# Altium PCB ESP_PCB.PcbDoc
Units mil, origin at the board's own origin, x right, y up, seen from the top; angles counter-clockwise.
Board outline 3180 x 3225 mil, 2 copper layers (Top Layer, Bottom Layer); 49 components, 37 nets, 138 pads, 0 vias.
Unrouted connection lines stored in the file: 80.
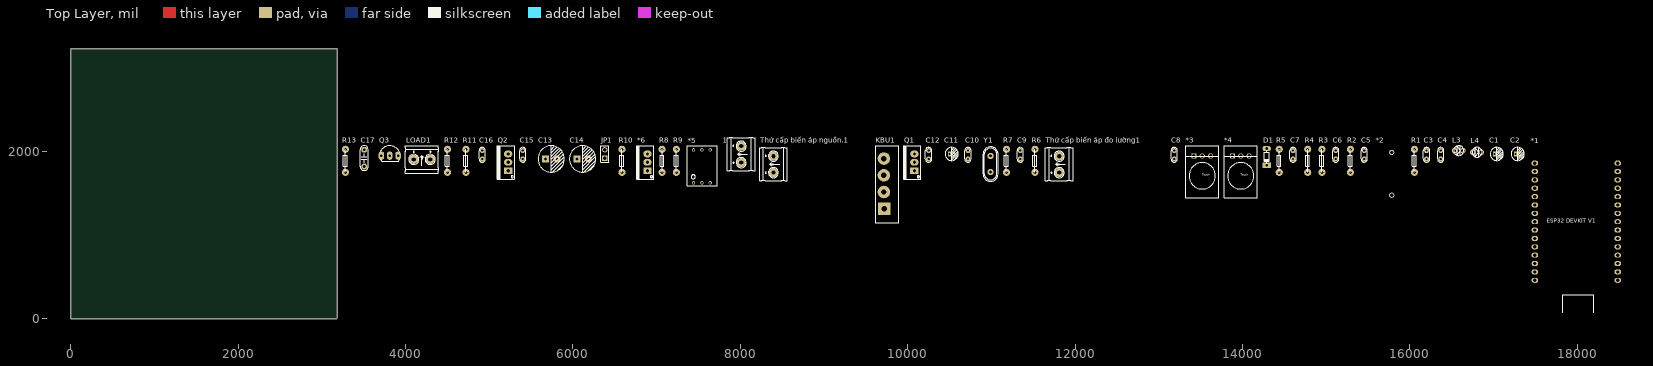
[diagram p0: Top Layer view]
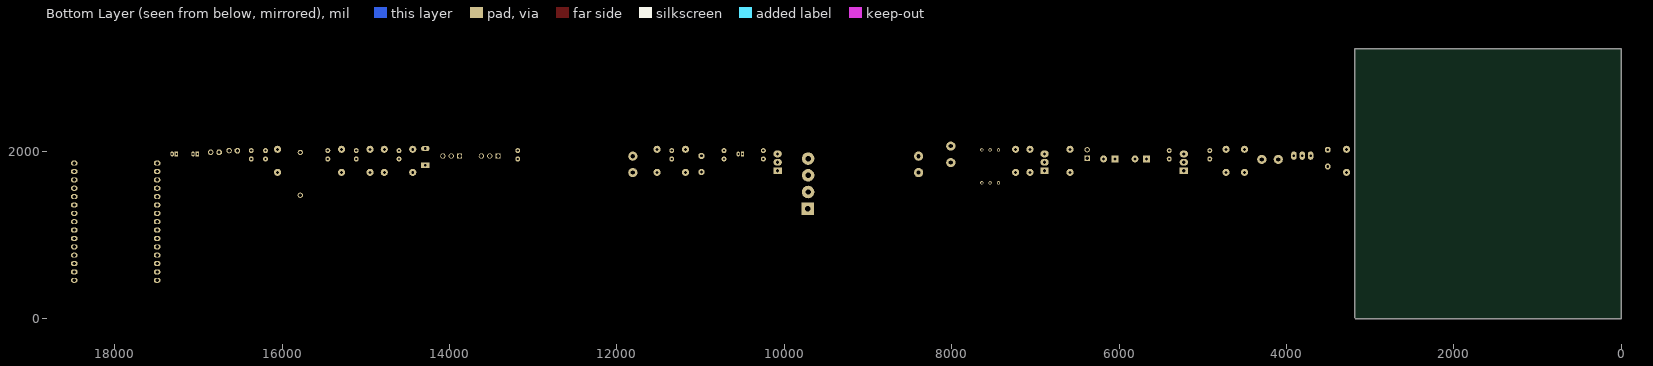
[diagram p1: Bottom Layer view, seen from below]

## Layer stack, top to bottom
Top Solder: solder mask 0.4, Solder Resist, Dk 3.5
Top Layer: signal copper 1.4
Dielectric 1: dielectric 12.6, FR-4, Dk 4.8
Bottom Layer: signal copper 1.4
Bottom Solder: solder mask 0.4, Solder Resist, Dk 3.5

## Board outline
0,0 0,3225 3180,3225 3180,10 3170,0

## Design rules (kind name [scope] priority, off if disabled: settings)
Clearance [All] p1: gap=10 ignorepadtopadclearanceinfootprint=FALSE except(0: Arc-Hole Track-Hole SMDPad-Hole THPad-Hole Via-Hole Fill-Hole Poly-Hole Region-Hole Text-Hole)
PlaneClearance [All] p1: clearance=40
PlaneConnect [All] p1: planeconnectstyle=Relief reliefexpansion=20 reliefentries=4 reliefconductorwidth=20 reliefairgap=20
PolygonConnect [All] p1: connectstyle=Relief reliefconductorwidth=20 reliefentries=4 polygonreliefangle="90 Angle" airgapwidth=20
RoomDefinition ESP_SCH [InComponentClass('ESP_SCH')] p1: confinementstyle=ConfineIn formatcopy=TRUE lockcomponents=FALSE outline 3225,60 18570,60 18570,2180 3225,2180
RoutingVias [All] p1: holewidth=28 width=50 viastyle="Through Hole" minholewidth=28 minwidth=50 maxholewidth=28 maxwidth=50
SolderMaskExpansion [All] p1: expansion=4 istentingtop=FALSE
Width [All] p1: maxlimit=30 minlimit=10 preferedwidth=20
28 further rules are at their usual default settings.

## Components (designator, comment, footprint, x,y, rotation, side; value= is the part's Value field where it differs from the comment)
1 "220VAC" KF127_2P 8010,1965 r90 top
*1 "ESP 32 DEVKIT V1" "ESP32 DEVKIT V1" 16050,235 r0 top
*2 "Current transformer 10A/5mA" 5A/5mA 15705,1555 r90 top
*3 "ON/OFF" TTP223 13520,1945 r0 top
*4 "SETUP" TTP223 13980,1945 r0 top
*5 "OPTO MOC3041" MOC3021 7440,1625 r90 top
*6 "LM7805" TO220 6890,1770 r90 top
C1 "10uF" "tu hoa 4mm" 17040,1970 r0 top
C2 "10uF" "tu hoa 4mm" 17290,1970 r0 top
C3 "104" "tu gom" 16200,1960 r90 top
C4 "104" "tu gom" 16370,1960 r90 top
C5 "33nF" "tu gom" 15455,1960 r90 top
C6 "33nF" "tu gom" 15115,1960 r90 top
C7 "33nF" "tu gom" 14605,1960 r90 top
C8 "22pF" "tu gom" 13185,1960 r90 top
C9 "33nF" "tu gom" 11345,1960 r90 top
C10 "22pF" "tu gom" 10720,1960 r90 top
C11 "10uF" "tu hoa 4mm" 10525,1970 r0 top
C12 "104" "tu gom" 10250,1960 r90 top
C13 "5000uF" "tu hoa 8mm" 5740,1910 r0 top
C14 "5000uF" "tu hoa 8mm" 6115,1910 r0 top
C15 "104" "tu gom" 5400,1960 r90 top
C16 "104" "tu gom" 4915,1960 r90 top
C17 "10nF 1000V" "tu tantalum dip5.08" 3505,1920 r90 top
D1 "3.3V" "DIODE 0.5A" 14290,1935 r90 top
JP1 "5VDC" "JP 1x2 DT" 6380,1920 r90 top
KBU1 "10A 1000V" "DIODE CAU 10A CAM" 9715,1315 r90 top
L3 "CONNETED" LED-3MM-GREEN 16535,2010 r0 top
L4 "NOT CONNECTED" LED-3MM-RED 16755,1990 r0 top
LOAD1 "LOAD" KF127_2P 4195,1905 r0 top
Q1 "BD536" to220 10080,1770 r90 top value=A1015
Q2 "BTA10-800B" to220 5225,1770 r90 top value=BTA41-600B
Q3 "C1815" TO92 3810,1950 r0 top value=C9014
R1 "1k" "Dien tro" 16055,1750 r90 top
R2 "100" "Dien tro" 15290,1750 r90 top
R3 "1k" "Dien tro" 14950,1750 r90 top
R4 "100R" "Dien tro" 14780,1750 r90 top
R5 "1k" "Dien tro" 14440,1750 r90 top
R6 "68K" "Dien tro" 11520,1750 r90 top
R7 "1k" "Dien tro" 11180,1750 r90 top
R8 "100" "Dien tro" 7065,1750 r90 top
R9 "360" "Dien tro" 7235,1750 r90 top
R10 "3 Ohm" "Dien tro" 6585,1750 r90 top
R11 "39" "Dien tro" 4720,1750 r90 top
R12 "1K" "Dien tro" 4500,1750 r90 top
R13 "330" "Dien tro" 3280,1750 r90 top
"Thứ cấp biến áp nguồn.1" "18VAC" KF127_2P 8395,1845 r90 top
"Thứ cấp biến áp đo lường1" "18VAC" KF127_2P 11810,1845 r90 top
Y1 "3.58Mhz" "Thach Anh 2 chan cam" 10990,1850 r90 top value=4Mhz

## Footprints (in the part's own frame and the unit in brackets; to place one, negate y for a bottom-side part, rotate by r counter-clockwise, add the part's x,y. Pads: shape width x height; smd on the part's side, far side on the other; paste and mask are expansions set on the pad)
5A/5mA [mm]
  round 1.6 hole 1: 1(-2,-2) 2(11,-2)
  body extent -4,-6.4 13.2,3.1, height 20.4
"Dien tro" [mm] "c?m"
  round 2.16 hole 0.9: 1(0,0) 2(7,0)
  silkscreen extent 0,-0.51 7,0.64, body extent -0.62,-0.87 7.48,1.13, height 2.5
"DIODE 0.5A" [mil] "Diode muoi, xung"
  oval 65x100 hole 32: 1(100,0)
  rect 65x100 hole 32: 2(-100,0)
  silkscreen extent -80,-30 80,28, body extent -108,-33 108,32, height 61
"DIODE CAU 10A CAM" [mil] "DIODE CAU 10A CAM"
  rect 150x150 hole 65: 1(0,-2)
  round 150 hole 65: 2(200,0) 3(400,0) 4(599,0)
  silkscreen extent -165,-175 755,105, body extent -162,-174 752,100, height 931
"ESP32 DEVKIT V1" [mil]
  oval 80x60 hole 39.5: 1(1445,1625) 2(1445,1525) 3(1445,1425) 4(1445,1325) 5(1445,1225) 6(1445,1125) 7(1445,1025) 8(1445,925) 9(1445,825) 10(1445,725) 11(1445,625) 12(1445,525) 13(1445,425) 14(1445,325) 15(1445,225) 16(2435,225) 17(2435,325) 18(2435,425) 19(2435,525) 20(2435,625) 21(2435,725) 22(2435,825) 23(2435,925) 24(2435,1025) 25(2435,1125) 26(2435,1225) 27(2435,1325) 28(2435,1425) 29(2435,1525) 30(2435,1625)
  silkscreen extent 1780,-165 2150,50, body extent 1388,-169 2510,1836, height 362
"JP 1x2 DT" [mm] "2 pins, 1 row, straight, gold plating"
  rect 1.6x1.6 hole 1.1: 1(0,0)
  round 1.6 hole 1.1: 2(2.54,0)
  silkscreen extent -1.27,-1.27 3.81,1.27, body extent -1.27,-1.27 3.81,1.27, height 8.54
KF127_2P [mil] "Header 2,pitch 5.08mm, Colour Green"
  round 110 hole 50: 1(-98.43,0) 2(98.43,0)
  silkscreen extent -197,-165 203,165, body extent -195,-161 199,161, height 394
LED-3MM-GREEN [mil]
  oct 65x65 hole 40: 1(0,0)
  round 65 hole 40: 2(100,0)
  silkscreen extent -9,-59 109,59, body extent -15,-70 112,60, height 182
LED-3MM-RED [mil]
  oct 65x65 hole 40: 1(0,0)
  round 65 hole 40: 2(100,0)
  silkscreen extent -9,-59 109,59, body extent -27,-77 117,80, height 181
MOC3021 [mm]
  round 1 hole 0.6: 1(0,0) 2(0,-2.54) 3(0,-5.08) 4(10,-5.08) 5(10,-2.54) 6(10,0)
  silkscreen extent -0.9,-7.24 11.2,1.86, body extent -0.36,-7.14 10.4,1.74, height 5.56
"Thach Anh 2 chan cam" [mm]
  round 1.905 hole 0.8: 1(-2.45,0) 2(2.45,0)
  silkscreen extent -5.28,-2.29 5.21,2.29, body extent -5.68,-2.36 5.68,2.29, height 3.5
TO92 [mil] "TO-92"
  oval 66x100 hole 32: 1(-100,0) 2(0,0) 3(100,0)
  silkscreen extent -117,-65 120,118, body extent -109,-66 109,95, height 245
TO220 [mil] "TO-220"
  rect 80x100 hole 39: 1(0,0)
  oval 80x100 hole 39: 2(100,0) 3(200,0)
  silkscreen extent -100,-76 300,130, body extent -95,-80 295,97, height 323
to220 [mil] "TO-220"
  rect 80x100 hole 39: 1(0,0)
  oval 80x100 hole 39: 2(100,0) 3(200,0)
  silkscreen extent -100,-76 300,130, body extent -95,-80 295,97, height 323
TTP223 [mm] "Touch sensor"
  rect 1.6x1.6 hole 1.1: 1(-2.54,0)
  round 1.6 hole 1.1: 2(0,0) 3(2.54,0)
  silkscreen extent -5.08,-12.7 5.08,3.1, body extent -3.81,-1.27 3.81,1.27, height 8.54
"tu gom" [mm] "Tu gom mini"
  round 1.5 hole 0.7: 1(-1.27,0) 2(1.27,0)
  silkscreen extent -2.25,-0.97 2.22,0.97, body extent -2.92,-0.85 2.92,0.85, height 6.12
"tu hoa 4mm" [mm]
  rect 1x1.5 hole 0.6: 1(-0.635,0)
  oval 1x1.5 hole 0.6: 2(0.635,0)
  silkscreen extent -2,-2 2.01,2.01, body extent -2.47,-2.47 2.58,2.58, height 14.81
"tu hoa 8mm" [mm]
  rect 2.1x2.1 hole 0.9: 1(-1.75,0)
  round 2.1 hole 0.9: 2(1.75,0)
  silkscreen extent -4,-4 4,4, body extent -4.1,-4.07 4.1,4.13, height 13.81
"tu tantalum dip5.08" [mm]
  round 1.8 hole 0.8: 1(-2.54,0) 2(2.54,0)
  silkscreen extent -3.74,-1.2 3.76,1.2, body extent -2.82,-1.08 2.77,1.08, height 6.27

## Part data
1 LOAD1 "Thứ cấp biến áp nguồn.1" "Thứ cấp biến áp đo lường1": library part "KF127 2P", "Header, 2-Pin, pitch 5.08mm", MPN=KF127-2P, Solder=WAVE
*2: library part "Current transformer", "Current transformer 5A/5mA"
*3 *4: library part "Touch sensor"
*5: library part "OPTO MOC3021"
*6: library part LM780x
C1 C2 C11: library part "Tu Hoa 10uF 25V 4x7", "Cắm", Chung_Loai=Cắm, Don_Vi=Con, Ma_Hang=MH001349, So_Chan=2, Ten_Linh_Kien="Tụ Hóa 10uF 25V 4x7MM"
C3 C4 C12: library part "Tu gom 104 50V", "Cắm", Chung_Loai=Cắm, Don_Vi=Con, Ma_Hang=MH004761, So_Chan=2, Ten_Linh_Kien="Tụ gốm 104 100nF 50V"
C5 C6 C7 C9: library part "Tu gom 333 50V", "Cắm", Chung_Loai=Cắm, Don_Vi=Con, Ma_Hang=MH004774, So_Chan=2, Ten_Linh_Kien="Tụ gốm 333-33nF 50V"
C8 C10: library part "Tu gom 221 50V", "Cắm", Chung_Loai=Cắm, Don_Vi=Con, Ma_Hang=MH004769, So_Chan=2, Ten_Linh_Kien="Tụ gốm 220P 221 50V"
C13 C14: library part "Tu Hoa 1000uF 16V 8x20", "Cắm", Chung_Loai=Cắm, Don_Vi=Con, Ma_Hang=MH008300, So_Chan=2, Ten_Linh_Kien="Tụ Hóa 1000uF 16V 8x20MM"
C15 C16: library part "Tu gom 473 50V", "Cắm", Chung_Loai=Cắm, Don_Vi=Con, Ma_Hang=MH004778, So_Chan=2, Ten_Linh_Kien="Tụ gốm 473-0.047uF 50V"
C17: library part "Tu tantalum 10nF DIP5.08", "Cắm", Chung_Loai=Cắm, Don_Vi=Con, Ma_Hang=MH002105, So_Chan=2, Ten_Linh_Kien="Tụ tantalum 103-10nF DIP5.08 (sứ vàng)(10PCS)"
D1: library part "Diode Zener 3.3V", "Dán", Chung_Loai=Dán, Don_Vi=Con, Ma_Hang=MH002880, Ten_Linh_Kien="Diode Zener 1/2W 3.3V SMD1206 ZMM3.3"
JP1: library part "JP 1x2 2.54 Duc Thang", "Cắm", Chung_Loai=Cắm, Don_Vi=Con, Ma_Hang=MH000903, Ten_Linh_Kien="Jump Đơn Đực 2.54MM 1x40P Thẳng 11MM"
KBU1: library part "Diode CAU 10A", "Cắm", Chung_Loai=cắm, Don_Vi=Con, Ma_Hang=MH004295, Ten_Linh_Kien="Diode Cầu 10A 1000V KBU1010"
L3: library part "LED 3mm Xanh La", "Cắm", Chung_Loai=Cắm, Don_Vi=Con, Ma_Hang=MH001054, Ten_Linh_Kien="Led 3MM Phủ Xanh (10c)"
L4: library part "LED 3mm Do", "Cắm", Chung_Loai=Cắm, Don_Vi=Con, Ma_Hang=MH003892, Ten_Linh_Kien="Led 3MM Phủ Đỏ (10c)"
Q1: library part A1015, "PNP 600mW, ECB"
Q2: library part BTA41-600BRG, "TRIAC 600V 40A TOP3", BAPartNumber=VT-xxx, Manufacturer=STMicroelectronics, Manufacturer Part Number=BTA41-600BRG, SOLD_BY=WAVE
Q3: "NPN transistor"
R1 R2 R3 R4 R5 R6 R7 R8 R9 R10 R11 R12 R13: library part Resistor, "Cắm"
Y1: library part "Thach Anh 2 chan Cam", "Crystal For all Crystal 2pin."

## Nets (pads, with @x,y where several pads share a name; then routed paths per layer and width w, separated by ;. In a path a pad name is that pad's centre, name@x,y a point inside that pad or via, vN(x,y) a via of type N, cw(c..) or ccw(c..) an arc to the next point about the centre after c; other vN are vias at no path point)
AGND: "Thứ cấp biến áp đo lường1.1" C2.2 C4.2 C5.2 C6.1 C7.2 C9.2 C11.2 C12.2 R5.1 R7.1
AVDD: C2.1 C4.1
buttonON/OFF: *1.9 *3.2
buttonSetup: *1.8 *4.2
CLKIN: C10.2 Y1.1
CLKOUT: C8.2 Y1.2
CS: *1.23
D27: *1.10 R12.2
DOUT: R4.2
DVDD: *1.15 *3.3 *4.3 *6.3 C1.1 C3.1 C14.1 C16.1 JP1.1 Q1.2 R8.2
GND: *1.14 *3.1 *4.1 *6.2 C1.2 C3.2 C8.1 C10.1 C13.2 C14.2 C15.2 C16.2 D1.1 JP1.2 KBU1.4 L3.2 L4.2 Q3.1
ledGreen: *1.6 L3.1
ledRed: *1.7 L4.1
LOAD: C17.2 LOAD1.2 Q2.1 R13.1
MISO: *1.25 D1.2 R4.1
MOSI: *1.30
Net*2_1: *2.1 R1.2 R2.2
Net*2_2: *2.2 R2.1 R3.2
Net*5_1: *5.1 R8.1
Net*5_2: *5.2 Q3.2
Net*5_4: *5.4 Q2.3 R13.2
Net*5_6: *5.6 R9.1
Net*6_1: *6.1 Q1.3 R10.1
NetC11_1: C11.1 C12.1
NetC13_1: C13.1 C15.1 KBU1.1 Q1.1 R10.2
NetC17_1: C17.1 R11.1
NetKBU1_2: "Thứ cấp biến áp nguồn.1.2" KBU1.2
NetKBU1_3: "Thứ cấp biến áp nguồn.1.1" KBU1.3
NetQ3_3: Q3.3 R12.1
NetR6_2: "Thứ cấp biến áp đo lường1.2" R6.2
NEUTRAL: 1.2 LOAD1.1
PHASE: 1.1 Q2.2 R9.2 R11.2
SCK: *1.24
V1N: C6.2 R3.1
V1P: C5.1 R1.1
V2N: C7.1 R5.2
V2P: C9.1 R6.1 R7.2
pads on no net: *1.1 *1.2 *1.3 *1.4 *1.5 *1.11 *1.12 *1.13 *1.16 *1.17 *1.18 *1.19 *1.20 *1.21 *1.22 *1.26 *1.27 *1.28 *1.29 *5.3 *5.5

## Text inside footprints (layer, text, board x,y; h text height)
*1: Top Overlay "ESP32 DEVKIT V1" at 17635,1145 h50
*3: Top Overlay "Touch" at 13520,1708.78 h20
*4: Top Overlay "Touch" at 13980,1708.78 h20